# Altium PCB Tigershark 3D R2.3a - TR.PcbDoc (part 3 of 4)
Units mil, origin at the board's own origin, x right, y up, seen from the top; angles counter-clockwise.
Board outline 4100 x 4050 mil, 4 copper layers (Top Layer, Groun Plane, Power Plane, Bottom Layer), stack 61.73 mil thick; 365 components, 237 nets, 1145 pads, 790 vias.
Unrouted connection lines stored in the file: 214.
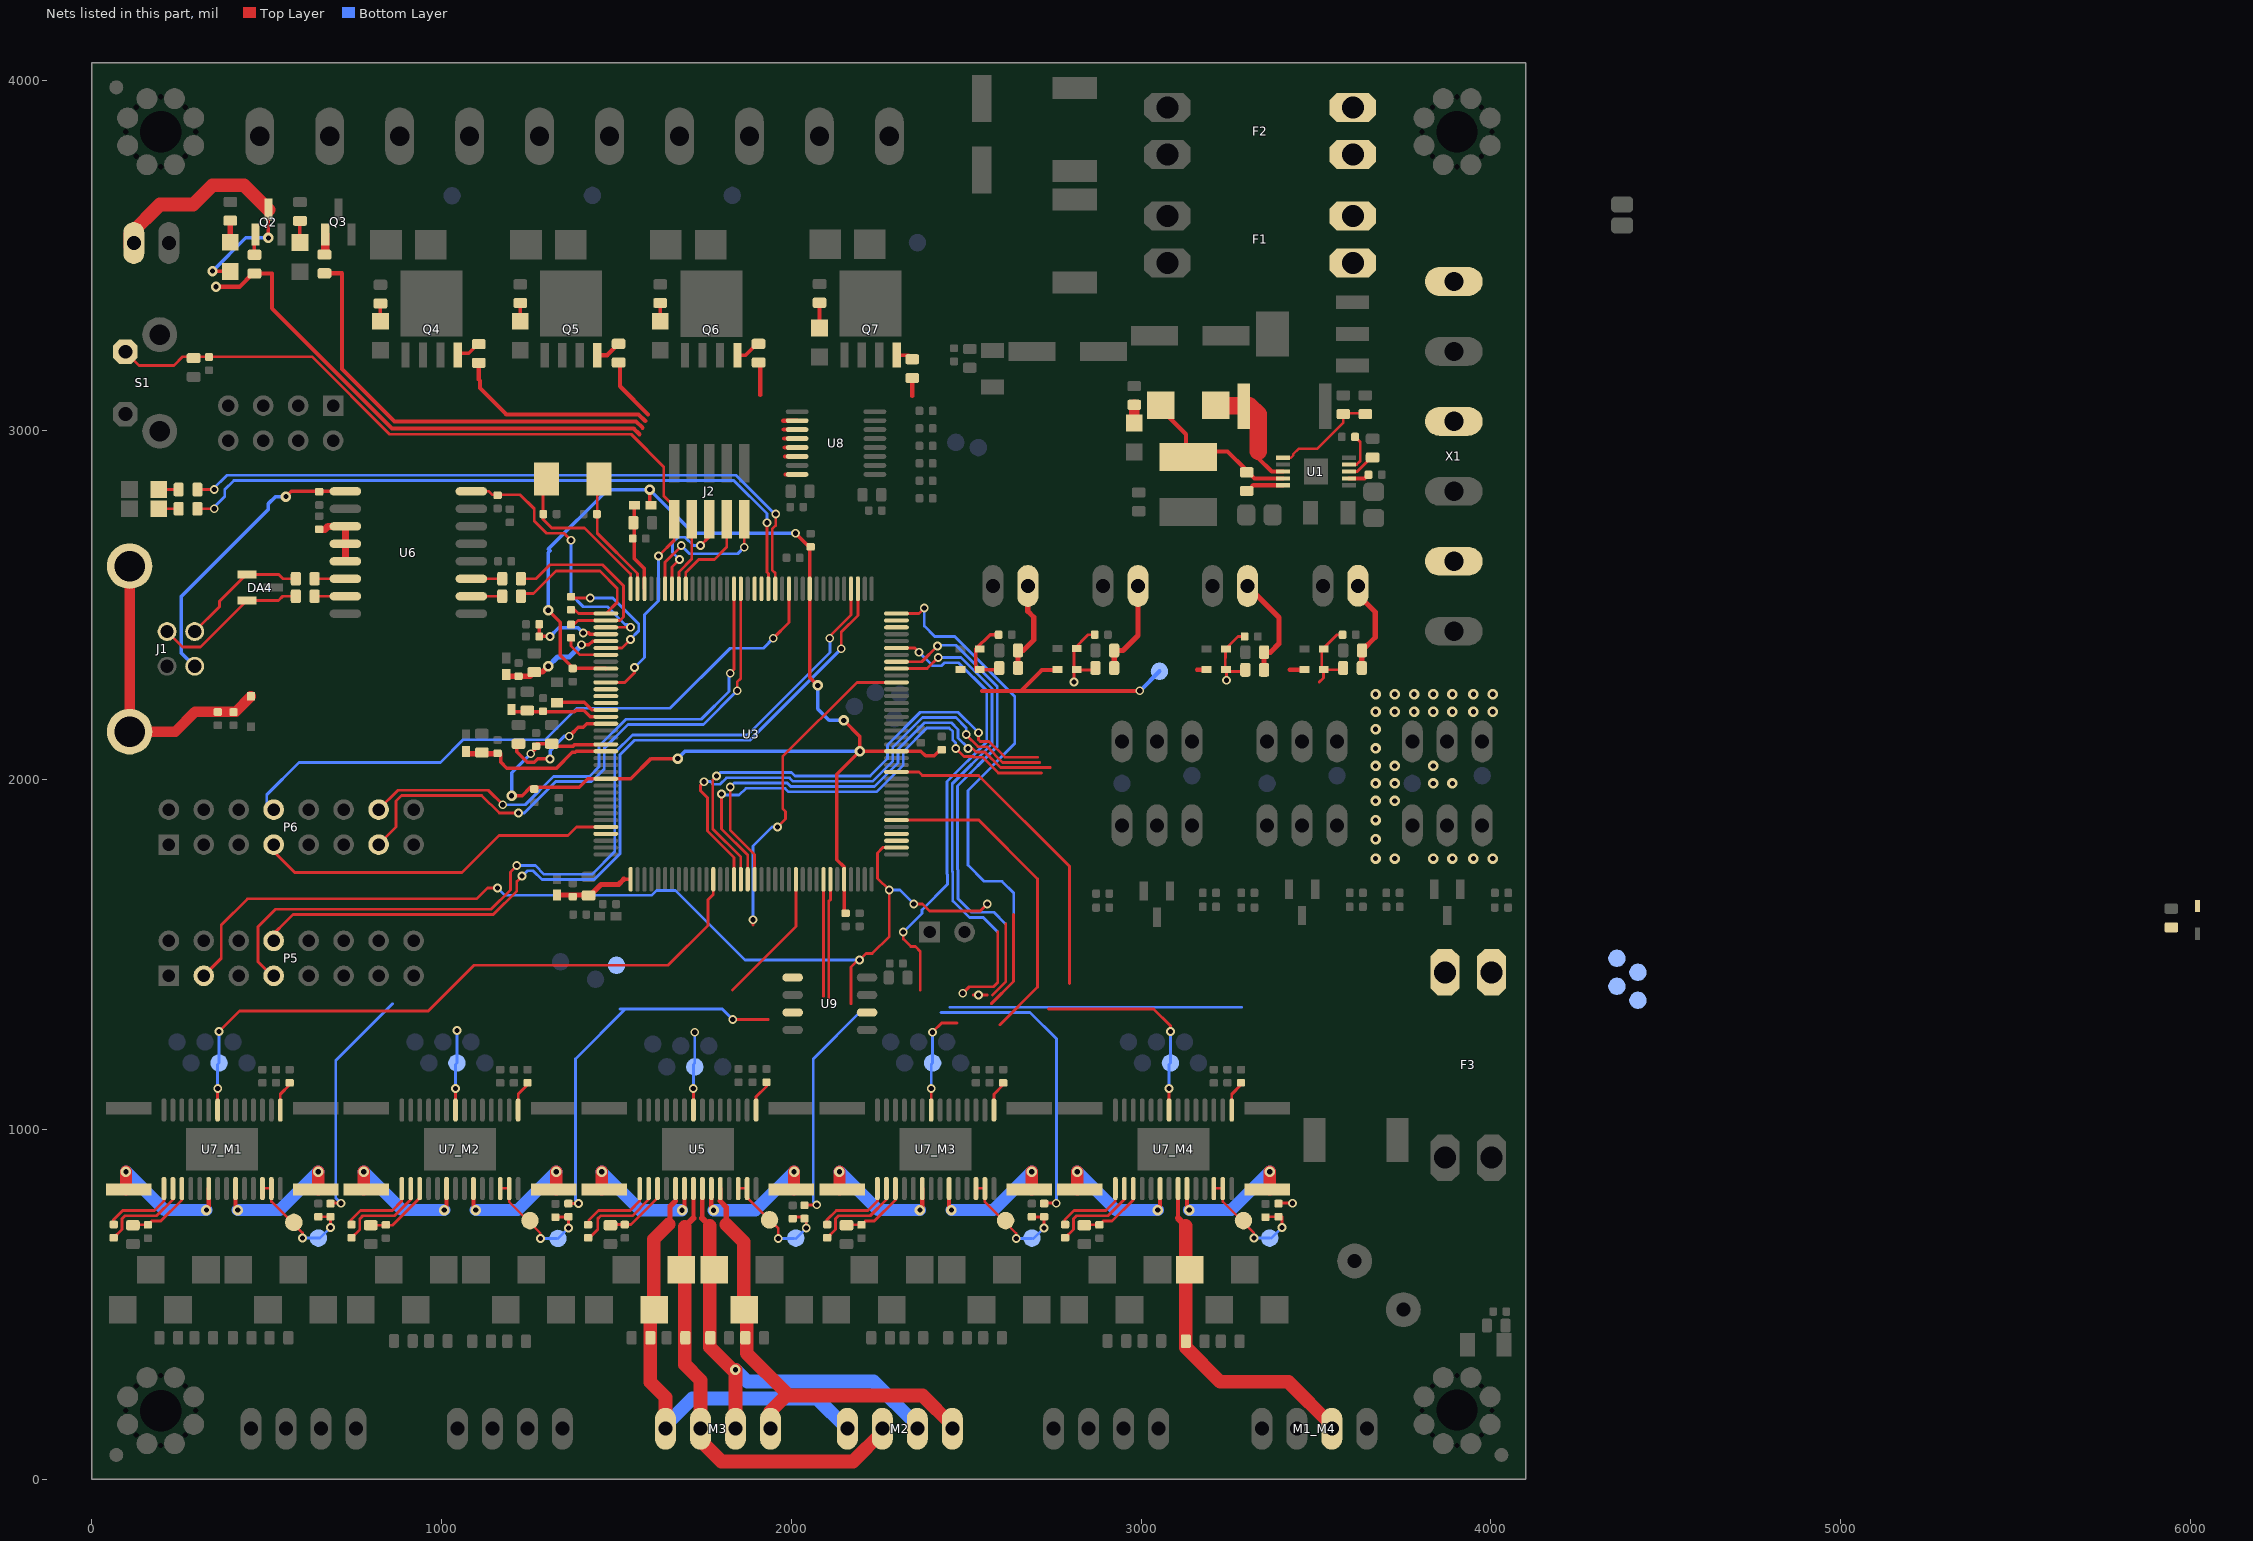
[diagram p5: the nets of this part, all layers, seen from the top]

## Via types
v1: diameter 30, hole 15, Top Layer to Bottom Layer, tented both sides, 411 vias
v2: diameter 25, hole 15, Top Layer to Bottom Layer, tented both sides, 207 vias
v3: diameter 19.68, hole 7.87, Top Layer to Bottom Layer, 75 vias
v4: diameter 30, hole 15, Top Layer to Bottom Layer, tented bottom, 64 vias
v5: diameter 25, hole 15, Top Layer to Bottom Layer, 21 vias
v6: diameter 30, hole 15, Top Layer to Bottom Layer, 9 vias
v7: diameter 45, hole 20, Top Layer to Bottom Layer, tented both sides, 2 vias
v8: diameter 25, hole 15, Top Layer to Bottom Layer, tented bottom, 1 vias

## Nets (pads, with @x,y where several pads share a name; then routed paths per layer and width w, separated by ;. In a path a pad name is that pad's centre, name@x,y a point inside that pad or via, vN(x,y) a via of type N, cw(c..) or ccw(c..) an arc to the next point about the centre after c; other vN are vias at no path point) (continued)
NetC8_M4_1: C8_M4.1 D23_M4.A M1_M4.2 U7_M4.8 | length 983.8
  Top Layer w12: 3105.29,747.2 U7_M4.8@3105.29,831.8 U7_M4.8@3105.29,832.8
  Top Layer w18: 3105.29,747.2 3127.49,725
  Top Layer w39: 3127.72,724.77 C8_M4.1@3127.72,395 3127.72,377.34 3226.05,279 3421,279 3545,155 M1_M4.2@3545,145
NetC22_1: C22.1 U1.4 | length 112
  Top Layer w8: U1.4@3594.17,2901.26 3616.03,2901.26 3626.48,2911.71 3626.48,2966.22 C22.1@3611.7,2981
NetC24_2: C24.2 D8.A J1.5 J1.6 R24.2 | length 862.1
  Top Layer w30: J1.5@108,2611.16 J1.6@108,2137.94 237.94,2137.94 295,2195 411,2195 D8.A@455,2239
NetC35_1: C35.1 R36.1 U5.3 | length 195.3
  Top Layer w8: C35.1@1482.49,726.77 1484.43,728.71 1541.56,728.71 1617.36,804.51 U5.3@1617.36,832.76
NetC40_1: C40.1 U1.10 | length 93.4
  Top Layer w12: C40.1@3314.23,2836.23 3320.2,2842.2 U1.10@3405.2,2842.2
NetC40_2: C40.2 D2.C L1.1 U1.9 | length 475.6
  Top Layer w12: D2.C@3045.26,3071 3128,2988.26 3128,2938.74 3247.03,2938.74 3296,2889.77 3323.88,2861.89 U1.9@3405.2,2861.89
NetC43_2: C43.2 U3.36 X2.1 | length 476.4
  Top Layer w8: X2.1@1300,2860 1290,2850 1290,2745 1315,2720 1408.79,2720 1540.51,2588.27 U3.36@1540.51,2546.46
NetC44_2: C44.2 U3.35 X2.2 | length 376.3
  Top Layer w8: X2.2@1445,2875 1445,2705 1560.2,2589.8 U3.35@1560.2,2546.46
NetC49_1: C49.1 U5.1 | length 218.5
  Top Layer w8: C49.1@1421.26,727.41 1421.26,741.5 1448.47,768.71 1539.14,768.71 1566.18,795.75 U5.1@1566.18,832.76
NetC49_2: C49.2 U5.2 | length 266.8
  Top Layer w8: C49.2@1421.26,689.71 1446.26,714.71 1446.26,745.29 1454.68,753.71 1545.35,753.71 1591.77,800.13 U5.2@1591.77,832.76
NetC50_2: C50.2 U5.15 | length 91.1
  Top Layer w8: U5.15@1899.09,1056.94 1899.09,1094.08 1928.75,1123.74 C50.2@1928.75,1135.74
NetC51_2: C51.2 R37.2 TP3.1 TP15.1 U5.12 U5.13 | length 358.8
  Top Layer w7: U5.12@1847.68,832.76 U5.13@1873.27,832.76 ; U5.13@1873.5,831.8 1873.5,806.22 TP3.1@1937.49,742.23 1962.75,716.97 v2(1962.75,689)
  Top Layer w8: C51.2@2007.75,750 2042.75,750 v2(2042.75,719)
  Bottom Layer w8: v2(1962.75,689) TP15.1@2007.75,689 ; TP15.1@2012.75,689 v2(2042.75,719)
NetC52_1: C52.1 D25.A M2.4 M3.4 U5.5 | length 1292.9
  Top Layer w12: 1668.55,795.99 U5.5@1668.55,832.76
  Top Layer w15: 1653.28,733.21 1653.28,780.73 1668.55,795.99
  Top Layer w39: D25.A@1606.52,519.97 1606.52,686.45 1649.52,729.45 ; D25.A@1607.75,484.74 1596.77,473.76 C52.1@1596.77,405 1596.77,278.23 1640,235 M3.4@1640,145
  Bottom Layer w39: M3.4@1640,145 1640,155 1716.5,231.5 2073.5,231.5 M2.4@2160,145
NetC58_1: C58.1 J1.1 U6.1 | length 819.1
  Top Layer w10: v1(555,2810) 570,2825 U6.1@724.88,2825
  Bottom Layer w10: J1.1@294,2324.94 255,2363.94 255,2524 505,2774 505,2790 525,2810 v1(555,2810)
NetC62_1: C62.1 D26.A M2.3 M3.3 U5.7 | length 1292.9
  Top Layer w12: 1719.73,747.17 U5.7@1719.73,832.76
  Top Layer w18: 1697.52,724.97 1719.73,747.17
  Top Layer w39: 1695.52,722.97 1695.52,394.74 1695.52,328.24 1740,283.76 M3.3@1740,145 ; M3.3@1740,111.5 1800,51.5 2176.4,51.5 M2.3@2260,135.1
NetC66_M1_1: C66_M1.1 R30_M1.1 U7_M1.3 | length 202.5
  Top Layer w8: C66_M1.1@117.49,726.77 118.62,727.9 R30_M1.1@160.49,727.9 171.33,738.74 196.98,738.74 257.33,799.09 U7_M1.3@257.33,831.8
NetC66_M2_1: C66_M2.1 R30_M2.1 U7_M2.3 | length 199.3
  Top Layer w8: C66_M2.1@797.49,726.77 859.56,726.77 937.33,804.54 U7_M2.3@937.33,831.8
NetC66_M3_1: C66_M3.1 R30_M3.1 U7_M3.3 | length 202.5
  Top Layer w8: C66_M3.1@2157.49,726.77 2158.62,727.9 R30_M3.1@2200.49,727.9 2211.33,738.74 2236.98,738.74 2297.33,799.09 U7_M3.3@2297.33,831.8
NetC66_M4_1: C66_M4.1 R30_M4.1 U7_M4.3 | length 202.5
  Top Layer w8: C66_M4.1@2837.49,726.77 2838.62,727.9 R30_M4.1@2880.49,727.9 2891.33,738.74 2916.98,738.74 2977.33,799.09 U7_M4.3@2977.33,831.8
NetC67_1: C67.1 D27.A M2.1 M3.1 U5.10 | length 1281.7
  Top Layer w12: 1796.5,795.99 U5.10@1796.5,832.76
  Top Layer w15: 1796.5,795.99 1813.52,778.97 1813.52,728.97
  Top Layer w39: 1813.52,728.97 1863.52,678.97 1863.52,519.97 D27.A@1872.52,510.97 ; D27.A@1864.75,484.74 1871.98,477.51 1871.98,394.74 1871.98,361.03 1985,248.01 1985,240 ; M3.1@1940,145 1940,195 1985,240 ; M2.1@2460,145 2460,155 2375,240 1985,240
NetC68_M1_1: C68_M1.1 U7_M1.1 | length 218.5
  Top Layer w8: C68_M1.1@61.23,727.44 61.23,741.53 88.44,768.74 179.11,768.74 206.15,795.79 U7_M1.1@206.15,832.8
NetC68_M1_2: C68_M1.2 U7_M1.2 | length 266.8
  Top Layer w8: C68_M1.2@61.23,689.74 86.23,714.74 86.23,745.32 94.65,753.74 185.32,753.74 231.74,800.16 U7_M1.2@231.74,832.8
NetC68_M2_1: C68_M2.1 U7_M2.1 | length 218.5
  Top Layer w8: C68_M2.1@741.23,727.44 741.23,741.53 768.44,768.74 859.11,768.74 886.15,795.79 U7_M2.1@886.15,832.8
NetC68_M2_2: C68_M2.2 U7_M2.2 | length 266.8
  Top Layer w8: C68_M2.2@741.23,689.74 766.23,714.74 766.23,745.32 774.65,753.74 865.32,753.74 911.74,800.16 U7_M2.2@911.74,832.8
NetC68_M3_1: C68_M3.1 U7_M3.1 | length 218.5
  Top Layer w8: C68_M3.1@2101.23,727.44 2101.23,741.53 2128.44,768.74 2219.11,768.74 2246.15,795.79 U7_M3.1@2246.15,832.8
NetC68_M3_2: C68_M3.2 U7_M3.2 | length 266.8
  Top Layer w8: C68_M3.2@2101.23,689.74 2126.23,714.74 2126.23,745.32 2134.65,753.74 2225.32,753.74 2271.74,800.16 U7_M3.2@2271.74,832.8
NetC68_M4_1: C68_M4.1 U7_M4.1 | length 218.5
  Top Layer w8: C68_M4.1@2781.23,727.44 2781.23,741.53 2808.44,768.74 2899.11,768.74 2926.15,795.79 U7_M4.1@2926.15,832.8
NetC68_M4_2: C68_M4.2 U7_M4.2 | length 266.8
  Top Layer w8: C68_M4.2@2781.23,689.74 2806.23,714.74 2806.23,745.32 2814.65,753.74 2905.32,753.74 2951.74,800.16 U7_M4.2@2951.74,832.8
NetC71_M1_2: C71_M1.2 U7_M1.15 | length 88.9
  Top Layer w8: U7_M1.15@538.83,1057.2 538.83,1101.34 566.23,1128.74 C71_M1.2@566.23,1134.74
NetC71_M2_2: C71_M2.2 U7_M2.15 | length 88.9
  Top Layer w8: U7_M2.15@1218.83,1057.2 1218.83,1101.34 1246.23,1128.74 C71_M2.2@1246.23,1134.74
NetC71_M3_2: C71_M3.2 U7_M3.15 | length 88.9
  Top Layer w8: U7_M3.15@2578.83,1057.2 2578.83,1101.34 2606.23,1128.74 C71_M3.2@2606.23,1134.74
NetC71_M4_2: C71_M4.2 U7_M4.15 | length 88.9
  Top Layer w8: U7_M4.15@3258.83,1057.2 3258.83,1101.34 3286.23,1128.74 C71_M4.2@3286.23,1134.74
NetC72_1: C72.1 D28.A M2.2 M3.2 U5.8 | length 1327.8
  Top Layer w12: 1745.32,747.17 U5.8@1745.32,832.76
  Top Layer w18: 1745.32,747.17 1766.98,725.51
  Top Layer w39: 1766.98,725.51 1766.98,394.74 1766.98,378.02 1831.24,313.76 v1(1840,313.76) M3.2@1840,145
  Bottom Layer w39: v1(1840,313.76) 1873.76,280 2234.9,280 2360,154.9 M2.2@2360,145
NetC73_2: C73.2 R23.2 U3.40 | length 243.6
  Top Layer w10: C73.2@1279,2445 R23.2@1279,2410 v2(1310,2410) ; v2(1405,2420) 1420,2420 1423.46,2416.54 U3.40@1469.65,2416.54
  Bottom Layer w10: v2(1310,2410) 1335,2435 1390,2435 v2(1405,2420)
NetC75_M1_2: C75_M1.2 R31_M1.2 TP1_M1.1 TP33_M1.1 U7_M1.12 U7_M1.13 | length 363.8
  Top Layer w7: U7_M1.12@487.65,832.8 513.24,832.8 513.24,794.25 602.49,705 v2(602.49,690)
  Top Layer w8: C75_M1.2@647.49,751 R31_M1.2@682.49,751 v2(682.49,720)
  Bottom Layer w8: v2(602.49,690) TP33_M1.1@647.49,690 652.49,690 v2(682.49,720)
NetC75_M2_2: C75_M2.2 R31_M2.2 TP1_M2.1 TP33_M2.1 U7_M2.12 U7_M2.13 | length 358.8
  Top Layer w7: U7_M2.12@1167.65,832.8 U7_M2.13@1193.24,832.8 ; U7_M2.13@1193.24,831.8 1193.24,793.25 1282.49,704 v2(1282.49,689)
  Top Layer w8: C75_M2.2@1327.49,750 1362.49,750 v2(1362.49,719)
  Bottom Layer w8: v2(1282.49,689) TP33_M2.1@1327.49,689 ; TP33_M2.1@1332.49,689 v2(1362.49,719)
NetC75_M3_2: C75_M3.2 R31_M3.2 TP1_M3.1 TP33_M3.1 U7_M3.12 U7_M3.13 | length 358.8
  Top Layer w7: U7_M3.12@2527.65,832.8 U7_M3.13@2553.24,832.8 ; U7_M3.13@2553.24,831.8 2553.24,793.25 2642.49,704 v2(2642.49,689)
  Top Layer w8: C75_M3.2@2687.49,750 2722.49,750 v2(2722.49,719)
  Bottom Layer w8: v2(2642.49,689) TP33_M3.1@2687.49,689 ; TP33_M3.1@2692.49,689 v2(2722.49,719)
NetC75_M4_2: C75_M4.2 R31_M4.2 TP1_M4.1 TP33_M4.1 U7_M4.12 U7_M4.13 | length 358.8
  Top Layer w7: U7_M4.12@3207.65,832.8 3233.24,832.8 3233.24,794.25 3322.49,705 v2(3322.49,690)
  Top Layer w8: 3367.49,751 3402.49,751 v2(3402.49,720)
  Bottom Layer w8: v2(3322.49,690) TP33_M4.1@3367.49,690 ; TP33_M4.1@3372.49,690 v2(3402.49,720)
NetD2_A: D2.A R9.2 U1.8 | length 326.9
  Top Layer w12: 3334.12,2940 3334.12,2920.78 3373.33,2881.57 U1.8@3405.2,2881.57
  Top Layer w50: D2.A@3214,3070 R9.2@3293.86,3070 ; R9.2@3308.86,3070 3334.12,3044.74 3334.12,2940
NetD10_A: D10.A R13.1 | length 61.9
  Top Layer w15: D10.A@396,3536.91 R13.1@396,3598.8
NetD10_C: D10.C FAN-1.2 Q2.3 | length 848.3
  Top Layer w10: v1(345,3454.57) 346,3453.57 D10.C@396,3453.57 ; v1(505,3549.57) Q2.3@505,3630.22
  Top Layer w39: FAN-1.2@110,3525 110,3560 195,3645 290,3645 345,3700 435.22,3700 Q2.3@505,3630.22
  Bottom Layer w10: v1(345,3454.57) 440,3549.57 v1(505,3549.57)
NetD11_A: D11.A R47.1 | length 66.1
  Top Layer w10: D11.A@595,3536.34 R47.1@595,3598.23 ; D11.A@601,3523.34 D11.A@604,3520.34
NetD13_A: D13.A R56.1 | length 50.5
  Top Layer w10: D13.A@825,3311.34 R56.1@825,3361.87
NetD14_A: D14.A R60.1 | length 51.9
  Top Layer w10: D14.A@1225,3311.34 R60.1@1225,3363.23
NetD16_A: D16.A R64.1 | length 51.9
  Top Layer w10: D16.A@1625,3311.34 R64.1@1625,3363.23
NetD18_A: D18.A R68.1 | length 52
  Top Layer w12: D18.A@2080.5,3295.53 2080.5,3347.5
NetD24_A: D24.A R25.2 | length 56.9
  Top Layer w8: D24.A@191.34,2830 R25.2@248.23,2830
NetD29_A: D29.A R26.2 | length 56.9
  Top Layer w8: D29.A@191.34,2775 R26.2@248.23,2775
NetF1_1: F1.1 X1.3
NetF2_1: F2.1 X1.1
NetF3_1: F3.1 X1.5
  other v1: 3670,1775 3725,1775 3835,1775 3890,1775 3950,1775 4005,1775 3670,1830 3670,1885 3670,1940 3725,1940 3670,1990 3725,1990 3835,1990 3890,1990 3670,2040 3725,2040 3835,2040 3670,2090 3670,2145 3670,2195 3725,2195 3780,2195 3835,2195 3890,2195 3950,2195 4005,2195 3670,2245 3725,2245 3780,2245 3835,2245 3890,2245 3950,2245 4005,2245
NetLED1_A: LED1.A R11.1 | length 51.9
  Top Layer w30: LED1.A@2980,3020.34 R11.1@2980,3072.23
NetP2_TR1_1: P2_TR1.1 R14_TR1.1 R19_TR1.1 | length 277.6
  Top Layer w15: R14_TR1.1@2922.77,2320.04 R19_TR1.1@2922.77,2370.04 2948.04,2370.04 2991,2413 P2_TR1.1@2991,2554.57
NetP2_TR2_1: P2_TR2.1 R14_TR2.1 R19_TR2.1 | length 269.3
  Top Layer w15: R14_TR2.1@2647.77,2320.04 R19_TR2.1@2647.77,2370.04 2663.04,2370.04 2693.05,2400.05 2693.05,2465.05 2676,2482.09 P2_TR2.1@2676,2554.57
NetP2_TR3_1: P2_TR3.1 R14_TR3.1 R19_TR3.1 | length 271.2
  Top Layer w15: P2_TR3.1@3619.53,2555 3619.53,2529.06 3669.06,2479.53 3669.06,2407.76 R19_TR3.1@3631.3,2370 ; R14_TR3.1@3630.82,2320 R19_TR3.1@3630.82,2370
NetP2_TR4_1: P2_TR4.1 R14_TR4.1 R19_TR4.1 | length 311.2
  Top Layer w8: R19_TR4.1@3351.3,2365 R19_TR4.1@3355.53,2369.23
  Top Layer w15: P2_TR4.1@3304.06,2554.53 3394.06,2464.53 3394.06,2389.53 3369.52,2365 R19_TR4.1@3351.3,2365 ; R14_TR4.1@3351.3,2314.52 R19_TR4.1@3351.3,2364.52
NetQ2_1: Q2.1 R45.2 | length 68.9
  Top Layer w10: R45.2@465,3501.34 465,3566.53 Q2.1@467.6,3569.13
NetQ3_1: Q3.1 R52.2 | length 58.9
  Top Layer w25: R52.2@665,3501.77 667.6,3504.38 Q3.1@667.6,3559.57
NetQ4_4: Q4.4 R58.2 | length 73.2
  Top Layer w10: Q4.4@1046.5,3214.66 1051.36,3219.53 1077.75,3219.53 R58.2@1106,3247.77
NetQ5_4: Q5.4 R62.2 | length 74.5
  Top Layer w12: Q5.4@1445,3214.28 1473.5,3214.28 R62.2@1506,3246.77
NetQ6_4: Q6.4 R66.2 | length 72.4
  Top Layer w10: Q6.4@1846,3213.85 1868.85,3213.85 R66.2@1903.89,3248.89
NetQ7_4: Q7.4 R70.2 | length 49
  Top Layer w10: Q7.4@2301.5,3214.66 2333.41,3214.66 R70.2@2345.49,3202.58
NetR4_1: R4.1 U3.51 | length 158.6
  Top Layer w10: R4.1@1320,2221.57 1407.47,2221.57 1429.04,2200 U3.51@1469.65,2200
NetR5_1: R5.1 U3.42 | length 360.6
  Top Layer w8: R5.1@1370,2523.9 1373.9,2520 v2(1425,2520) ; U3.42@1469.65,2377.17 1516.06,2377.17 v2(1540,2401.1)
  Bottom Layer w8: v2(1425,2520) 1489.34,2520 1563.5,2445.84 1563.5,2426.37 1540,2402.87 v2(1540,2401.1)
NetR6_1: R6.1 U3.53 | length 352.5
  Top Layer w10: R6.1@1215,2093.23 1215,2080 1244.5,2050.5 1265.15,2050.5 1274.65,2060 v2(1310,2060) ; v2@1360,2120 1370,2120 1370,2129.65 1390.85,2150.5 1405.15,2150.5 1415.28,2160.63 U3.53@1469.65,2160.63
  Bottom Layer w10: v2(1310,2060) 1310,2084 1310.12,2084 1351.12,2125 v2(1365,2125)
NetR7_1: R7.1 U1.3 | length 76.4
  Top Layer w8: U1.3@3594.17,2881.57 3617.57,2881.57 3649.86,2913.86 R7.1@3657.16,2913.86
NetR10_2: R10.2 R12.1 U1.6 | length 291.8
  Top Layer w7: U1.6@3405.2,2920.94 3427.94,2920.94 3434.82,2927.82 3434.82,2931.51 3449.75,2946.44 3502.44,2946.44 3578,3022 R10.2@3578,3040.85 ; R10.2@3585.55,3048.4 R12.1@3641.64,3048.4
NetR17_1: R17.1 U1.2 | length 56.9
  Top Layer w12: U1.2@3594.17,2861.89 3638.27,2861.89 R17.1@3647.32,2870.95
NetR22_1: R22.1 U3.43 | length 123.4
  Top Layer w8: R22.1@1370,2396.1 1370,2382.87 1395.39,2357.48 U3.43@1469.65,2357.48
NetR32_M1_2: R32_M1.2 U7_M1.9 | length 392.5
  Top Layer w12: U7_M1.9@410.88,832.8 410.88,776.61 v1(417.49,770)
  Top Layer w35: R32_M1.2@647.49,828.6 v1(647.49,880)
  Bottom Layer w35: v1(417.49,770) 537.49,770 v1(647.49,880)
NetR32_M2_2: R32_M2.2 U7_M2.9 | length 392.5
  Top Layer w12: U7_M2.9@1090.88,832.8 1090.88,776.61 v1(1097.49,770)
  Top Layer w35: R32_M2.2@1327.49,828.6 v1(1327.49,880)
  Bottom Layer w35: v1(1097.49,770) 1217.49,770 v1(1327.49,880)
NetR32_M3_2: R32_M3.2 U7_M3.9 | length 392.5
  Top Layer w12: U7_M3.9@2450.88,832.8 2450.88,776.61 v1(2457.49,770)
  Top Layer w35: R32_M3.2@2687.49,828.6 v1(2687.49,880)
  Bottom Layer w35: v1(2457.49,770) 2577.49,770 v1(2687.49,880)
NetR32_M4_2: R32_M4.2 U7_M4.9 | length 392.5
  Top Layer w12: U7_M4.9@3130.88,832.8 3130.88,776.61 v1(3137.49,770)
  Top Layer w35: R32_M4.2@3367.49,828.6 v1(3367.49,880)
  Bottom Layer w35: v1(3137.49,770) 3257.49,770 v1(3367.49,880)
NetR33_M1_2: R33_M1.2 U7_M1.6 | length 392.5
  Top Layer w12: v1(327.49,770) 334.1,776.61 U7_M1.6@334.1,832.8
  Top Layer w35: R33_M1.2@97.49,828.6 v1(97.49,880)
  Bottom Layer w35: v1(97.49,880) 207.49,770 v1(327.49,770)
NetR33_M2_2: R33_M2.2 U7_M2.6 | length 392.5
  Top Layer w12: v1(1007.49,770) 1014.1,776.61 U7_M2.6@1014.1,832.8
  Top Layer w35: R33_M2.2@777.49,828.6 v1(777.49,880)
  Bottom Layer w35: v1(777.49,880) 887.49,770 v1(1007.49,770)
NetR33_M3_2: R33_M3.2 U7_M3.6 | length 392.2
  Top Layer w12: v1(2367.49,770) 2374.1,776.61 U7_M3.6@2374.1,832.8
  Top Layer w35: R33_M3.2@2137.49,828.86 v1(2137.49,880)
  Bottom Layer w35: v1(2137.49,880) 2247.49,770 v1(2367.49,770)
NetR33_M4_2: R33_M4.2 U7_M4.6 | length 392.5
  Top Layer w12: v1(3047.49,770) 3054.1,776.61 U7_M4.6@3054.1,832.8
  Top Layer w35: R33_M4.2@2817.49,828.6 v1(2817.49,880)
  Bottom Layer w35: v1(2817.49,880) 2927.49,770 v1(3047.49,770)
NetR38_2: R38.2 U5.9 | length 392.5
  Top Layer w12: U5.9@1770.91,832.76 1770.91,776.58 v1(1777.52,769.97)
  Top Layer w35: R38.2@2007.52,828.6 v1(2007.52,879.97)
  Bottom Layer w35: v1(1777.52,769.97) 1897.52,769.97 v1(2007.52,879.97)
NetR39_2: R39.2 U5.6 | length 392.5
  Top Layer w12: v1(1687.52,769.97) 1694.14,776.58 U5.6@1694.14,832.76
  Top Layer w35: R39.2@1457.52,828.6 v1(1457.52,879.97)
  Bottom Layer w35: v1(1457.52,879.97) 1567.52,769.97 v1(1687.52,769.97)
NetR45_1: R45.1 U8.16 | length 1503.6
  Top Layer w12: v1(355,3409.57) 421.77,3409.57 R45.1@460,3447.8 ; R45.1@465,3447.8 515,3447.8 515,3348.13 858.13,3005 1549.04,3005 1566.04,2988 ; 1983.43,2873.43 U8.16@2016.34,2873.43
NetR52_1: R52.1 U8.14 | length 1286
  Top Layer w12: R52.1@665,3448.23 715,3448.23 715,3175 865,3025 1555.91,3025 1573.91,3007 ; 1982.09,2924.61 U8.14@2016.34,2924.61
NetR58_1: R58.1 U8.13 | length 615.1
  Top Layer w12: 1106,3144.77 R58.1@1106,3192.23 ; 1109.77,3141 1109.77,3120.23 1185,3045 1563.13,3045 1582.13,3026 ; 1980.81,2950.2 U8.13@2016.34,2950.2
NetR62_1: R62.1 U8.12 | length 214.5
  Top Layer w12: R62.1@1509.77,3189.46 1509.77,3142 1509.77,3125.23 1590,3045 ; 1979.54,2975.8 U8.12@2016.34,2975.8
NetR66_1: R66.1 U8.11 | length 125.8
  Top Layer w12: 1910.77,3100.77 1910.77,3142 R66.1@1910.77,3188.46 ; 1978.26,3001.39 U8.11@2016.34,3001.39
NetR70_1: R70.1 U8.10 | length 90.8
  Top Layer w12: 1976.98,3026.98 U8.10@2016.34,3026.98 ; 2345.49,3097.58 R70.1@2345.49,3149.04
NRST: U3.69
OVREF: D1.2 D3_TR1.C D3_TR2.C D3_TR3.C D3_TR4.C R1.1 TP2.1 | length 730.6
  Top Layer w12: 2544.93,2254.55 2655.97,2254.55 ; D3_TR1.C@2759.43,2314.57 2716,2314.57 2655.97,2254.55 ; v2(2996.25,2254.55) 2655.97,2254.55 ; 3159.53,2315 D3_TR4.C@3187.95,2315 ; 3424.53,2315 D3_TR3.C@3467.95,2315
  Bottom Layer w12: v2(2996.25,2254.55) TP2.1@3052.22,2310.52
R_N: DA4.1 J1.2 R18.2 | length 368.4
  Top Layer w8: J1.2@294,2424.15 365,2495.15 365,2510.84 433.66,2579.5 435.58,2579.5 DA4.1@443.48,2587.4 534.39,2587.4 546.8,2575 R18.2@580.47,2575
R_P: DA4.2 J1.3 R20.2 | length 443.8
  Top Layer w8: J1.3@215,2424.15 259.15,2380 310.88,2380 DA4.2@443.48,2512.6 533.48,2512.6 545.88,2525 R20.2@580.47,2525
REF1: R31_M1.1 U3.139 | length 1974
  Top Layer w8: R31_M1.1@682.49,788.9 683.59,790 v2(712.49,790) ; U3.139@2300.35,2377.17 2352.83,2377.17 v2(2365,2365) ; v5(2320,1565) 2320,1545 2341.5,1523.5 2354.73,1523.5 2368.5,1509.73 2368.5,1398.5
  Bottom Layer w8: v2(712.49,790) 697.49,805 697.49,1197.52 859.97,1360 ; v5(2320,1565) 2373.5,1618.5 2373.5,1628.5 2446.5,1701.5 2446.5,1729.86 2445,1731.36 2445,1995 2558.5,2108.5 2558.5,2254.73 2478.23,2335 2438.23,2335 2429.73,2326.5 2403.5,2326.5 v2(2365,2365)
REF2: R31_M2.1 U3.102 | length 1426
  Top Layer w8: R31_M2.1@1362.49,788.9 v2(1391.39,788.9) ; v8(1832.49,1315) 1933.7,1315 ; 2106.69,1375.48 2106.69,1652.91 2111.38,1657.59 U3.102@2111.38,1715.75
  Bottom Layer w8: v2(1391.39,788.9) 1382.49,797.8 1382.49,1202.48 1525.01,1345 ; 1510.01,1345 1802.49,1345 v8(1832.49,1315)
REF3: R31_M3.1 U3.136 | length 2271.4
  Top Layer w8: U3.136@2300.35,2318.11 2388.11,2318.11 v2(2420,2350) v2@2425,2350 ; v2(2490,1390) 2508.5,1408.5 2577.29,1408.5 2590,1421.21 2590,1565 ; R31_M3.1@2722.49,788.9 2723.59,790 v5(2757.49,790)
  Bottom Layer w8: v2(2420,2350) 2484.45,2350 2573.5,2260.95 2573.5,2102.29 2460,1988.79 2460,1737.57 2461.5,1736.07 2461.5,1654.05 2509.05,1606.5 2548.5,1606.5 2590,1565 ; 2427.49,1335 2682.49,1335 2757.49,1260 v5(2757.49,790)
REF4: R31_M4.1 U3.137 | length 2310.9
  Top Layer w8: U3.137@2300.35,2337.8 2372.8,2337.8 v2(2417.5,2382.5) ; 2520,1385 2560,1385 ; 2575,1385 2612.63,1422.63 2612.63,1587.63 ; R31_M4.1@3392.49,788.9 3393.59,790 v5(3432.49,790)
  Bottom Layer w8: v2(2417.5,2382.5) 2420,2385 2470.66,2385 2588.5,2267.16 2588.5,2096.07 2475,1982.57 2475,1743.79 2476.5,1742.29 2476.5,1660.27 2515.27,1621.5 2578.75,1621.5 2612.63,1587.63 ; 2452.49,1350 3287.49,1350
  other v2: 2535,1385
REF_EXP1: P6.13 U3.20 | length 1643.5
  Top Layer w8: P6.13@800,1815 P6.13@820,1815 870,1865 870,1940 885.53,1955.53 1114.47,1955.53 1165,1905 v2(1220,1905) ; v2(1845,2255) 1845,2280 1855.47,2290.47 U3.20@1855.47,2546.46
  Bottom Layer w8: v2(1220,1905) 1236.21,1905 1326.21,1995 1428.79,1995 1465,2031.21 1465,2090.41 1533.09,2158.5 1748.5,2158.5 v2(1845,2255)
REF_EXP2: P6.14 U3.21 | length 1530.1
  Top Layer w8: P6.14@800,1915 P6.14@820,1915 875.53,1970.53 1133.47,1970.53 v2(1175,1929) ; v2(1825,2305) 1835.79,2315.79 U3.21@1835.79,2546.46
  Bottom Layer w8: v2(1175,1929) 1239,1929 1320,2010 1422.57,2010 1450,2037.43 1450,2096.62 1526.88,2173.5 1742.29,2173.5 1821.5,2252.71 1821.5,2301.5 v2(1825,2305)
REF_Z: R37.1 U3.144 | length 2171.1
  Top Layer w8: R37.1@2037.49,783.9 2038.59,785 v5(2072.49,785) ; U3.144@2300.35,2475.59 2364.41,2475.59 v2(2380,2491.18) ; 2571.21,1360 2635,1423.79 2635,1615
  Bottom Layer w8: v5(2072.49,785) 2062.49,795 2062.49,1202.48 2197.49,1337.48 ; v2(2380,2491.18) 2380,2440 2410,2410 2466.87,2410 2638.5,2238.37 2638.5,2103.5 2505,1970 2505,1756.21 2551.21,1710 2601.77,1710 2635.61,1676.16 2635.61,1615
RESET: C63.2 J2.10 R21.1 S1.1 U3.47 | length 2437.3
  Top Layer w8: S1.1@96,3224 135,3185 235,3185 260,3210 629.09,3210 851.09,2988 1542,2988 1635,2895 1635,2812.11 1665,2782.11 J2.10@1665,2745.08 1665,2685 v2(1620,2640) ; U3.47@1469.65,2278.74 1523.74,2278.74 1551.19,2306.19 v2(1551.19,2321.6)
  Bottom Layer w8: v2(1551.19,2321.6) 1580,2350.41 1580,2472.2 1620,2512.2 v2(1620,2640)
RXD0: P5.8 U3.3 | length 2382.1
  Top Layer w8: P5.8@500,1540 575,1615 1147.57,1615 1215,1682.43 1215,1710 v2(1230,1725) ; v2(2142.43,2375) 2142.43,2422.43 2190.12,2470.12 U3.3@2190.12,2546.46
  Bottom Layer w8: v2(1230,1725) 1245,1740 1262.02,1740 1287.02,1715 1436.21,1715 1510,1788.79 1510,2071.77 1551.73,2113.5 1880.93,2113.5 v2(2142.43,2375)
RXD1: U3.18
SCLK: P5.3 TP6.1 U3.110 U9.6 | length 3030.7
  Top Layer w8: P5.3@300,1440 P5.3@320,1440 370,1490 370,1585 445,1660 1100,1660 1131.21,1691.21 v2(1160,1691.21) ; 2170,1360 2170,1465 v2@2195,1490 ; v2(2195,1485) 2213.5,1503.5 2230.93,1503.5 2280,1552.57 v2(2280,1685) 2246.39,1718.61 2246.39,1791.39 2261.3,1806.3 U3.110@2300.35,1806.3 ; v2(2350,1645) 2375,1645 2395,1625 2540,1625 v2(2560,1645)
  Bottom Layer w8: v2(1160,1691.21) 1181.21,1670 1600.55,1670 1614.05,1683.5 1669.07,1683.5 1867.57,1485 v2(2195,1485) ; v2(2280,1685) 2310,1685 v2(2350,1645)
SHDN: U3.50
SPIFLASH_CS: U9.1
STATUS_A: U3.142
STATUS_B: U3.143
STEP1: TP40_M1.1 U3.85 U7_M1.22 | length 1886.8
  Top Layer w8: U7_M1.22@359.69,1057.2 v2(359.69,1117.64) ; v2(363.72,1280.77) 422.42,1339.47 961.64,1339.47 1092.17,1470 1647.28,1470 1761.5,1584.22 1761.5,1657.16 1776.73,1672.39 U3.85@1776.73,1715.75
  Bottom Layer w8: v2@359.49,1117.84 v2(359.69,1117.64) 359.69,1186.75 TP40_M1.1@363.72,1190.77 v2(363.72,1280.77)
STEP2: TP40_M2.1 U3.134 U7_M2.22 | length 1171.6
  Top Layer w8: U7_M2.22@1039.69,1057.2 v2(1039.69,1117.64) ; 1890,1585 v2(1890,1600) ; v2(1960,1865) 1983.5,1888.5 1983.5,1909.73 1975,1918.23 1975,2066.36 2187.38,2278.74 U3.134@2300.35,2278.74
  Bottom Layer w8: v2@1039.49,1117.84 v2(1039.69,1117.64) 1039.69,1186.75 TP40_M2.1@1043.72,1190.77 v2@1043.72,1280.77 ; v2(1890,1600) 1890,1810.55 1944.45,1865 v2(1960,1865)
  other v2: 1043.75,1283.74
STEP3: TP40_M3.1 U3.114 U7_M3.22 | length 1242.1
  Top Layer w8: U3.114@2301.42,1886.1 U3.114@2300.35,1885.04 2535.62,1885.04 2703.5,1717.16 2703.5,1407.43 2596.07,1300 ; U7_M3.22@2399.69,1057.2 v2(2399.69,1117.64) ; v2(2403.75,1278.74) 2430.01,1305 2473.56,1305
  Bottom Layer w8: v2@2399.49,1117.84 v2(2399.69,1117.64) 2399.69,1186.75 TP40_M3.1@2403.72,1190.77 v2@2403.72,1280.77
STEP4: TP40_M4.1 U3.121 U7_M4.22 | length 1552.1
  Top Layer w8: U3.121@2300.35,2022.83 2300.69,2022.5 2364.4,2022.5 2374.31,2012.59 2535.35,2012.59 2795,1752.94 2795,1417.57 ; 2735.06,1345 3035.72,1345 3083.72,1297.01 v2(3083.72,1280.77) ; U7_M4.22@3079.69,1057.2 v2(3079.69,1117.64)
  Bottom Layer w8: v2@3079.49,1117.84 v2(3079.69,1117.64) 3079.69,1186.75 TP40_M4.1@3083.72,1190.77 v2(3083.72,1280.77)
STEP_EXP1: P6.7 U3.68 | length 1056.8
  Top Layer w8: P6.7@500,1815 580,1735 1058.13,1735 1164.11,1840.98 1360.98,1840.98 1385.35,1865.35 U3.68@1469.65,1865.35
STEP_EXP2: P6.8 U3.13 | length 1836.2
  Top Layer w8: v2(1948.23,2405) 1993.27,2450.03 U3.13@1993.27,2546.46
  Bottom Layer w8: P6.8@500,1915 500,1957.57 592.43,2050 996.77,2050 1061.77,2115 1297.28,2115 1387.28,2205 1653.64,2205 1825.14,2376.5 1919.73,2376.5 v2(1948.23,2405)
STEP_Z: TP21.1 U3.97 U5.22 | length 615.3
  Top Layer w8: U5.22@1719.73,1057.17 v5(1719.73,1117.61) ; 1831.26,1398.98 2012.95,1580.67 U3.97@2012.95,1715.75
  Bottom Layer w8: v5(1719.73,1117.61) 1719.73,1186.72 1723.75,1190.74 v5(1723.75,1278.74)
TC_CS1: U3.111
TC_CS2: U3.112
TCK/SWDCLK: J2.4 U3.28 | length 273.4
  Top Layer w8: U3.28@1697.99,2546.46 1697.99,2592.99 1735,2630 1780,2630 1815,2665 J2.4@1815,2745.08
TDI: J2.8 U3.29 | length 213.8
  Top Layer w8: U3.29@1678.31,2546.46 1678.31,2594.52 1715,2631.21 J2.8@1715,2745.08
TDO/SWO: J2.6 U3.30 | length 330.4
  Top Layer w8: U3.30@1658.62,2546.46 1658.62,2608.62 v2(1680,2630) ; v2(1740,2670) 1765,2695 J2.6@1765,2745.08
  Bottom Layer w8: v2(1680,2630) 1660,2650 1660,2678.23 1675.27,2693.5 1696.5,2693.5 1720,2670 v2(1740,2670)
THERM_AN1: C30_TR1.1 D3_TR1.A D5_TR1.C R14_TR1.2 TP52_TR1.1 U3.88 | length 1696.8
  Top Layer w8: v2(1750,1995) 1740,1985 1740,1968.79 1760,1948.79 1760,1853.79 1835.79,1778 U3.88@1835.79,1715.75 ; v2(2500,2130) 2500,2128.79 2533.79,2095 2559.01,2095 2604.01,2050 2710,2050 ; v2(2808.05,2280.05) 2807.57,2280.52 D3_TR1.A@2807.57,2314.57 ; C30_TR1.1@2867.3,2415.05 2848.05,2415.05 2807.57,2374.57 D3_TR1.A@2807.57,2314.57 ; R14_TR1.2@2869.23,2320.04 2863.76,2314.57 D3_TR1.A@2807.57,2314.57
  Bottom Layer w8: v2(1750,1995) 1768.55,1995 1776.16,1987.39 1795.62,1987.39 1814.12,2005.89 1994.26,2005.89 2004.26,1995.89 2231.41,1995.89 2290,2054.48 2290,2093.79 2374.71,2178.5 2470.29,2178.5 2500,2148.79 v2(2500,2130)
THERM_AN2: C30_TR2.1 D3_TR2.A D5_TR2.C R14_TR2.2 TP52_TR2.1 U3.89 | length 1637
  Top Layer w8: v2(1785.89,2010.89) 1775,2000 1775,1860 1855.47,1779.53 U3.89@1855.47,1715.75 ; v2(2535,2135) 2535,2115 2540,2110 2565.22,2110 2610.22,2065 2703.79,2065
  Top Layer w10: D3_TR2.A@2537.57,2310.52 D3_TR2.A@2537.57,2315.05 ; C30_TR2.1@2592.3,2415.05 2568.05,2415.05 2527.57,2374.57 2527.57,2315.05 D3_TR2.A@2537.57,2315.05 ; R14_TR2.2@2594.23,2320.04 2589.23,2315.05 D3_TR2.A@2537.57,2315.05
  Bottom Layer w8: v2(1785.89,2010.89) 1795.89,2020.89 2000.47,2020.89 2010.47,2010.89 2225.2,2010.89 2275,2060.69 2275,2100 2368.5,2193.5 2476.5,2193.5 v2(2535,2135)
THERM_AN3: C30_TR3.1 D3_TR3.A D5_TR3.C R14_TR3.2 TP52_TR3.1 U3.90 | length 1614.5
  Top Layer w8: v2(1800,1960) 1800,1860 1875.16,1784.84 U3.90@1875.16,1715.75 ; v2(2470,2090) 2493.5,2066.5 2519.86,2066.5 2521.36,2065 2546.58,2065 2591.58,2020 2715,2020 ; 3509.06,2279.53 3521.1,2291.57 D3_TR3.A@3521.1,2315 ; R14_TR3.2@3575,2310 3570,2315 D3_TR3.A@3521.1,2315 ; C30_TR3.1@3575.83,2415 3560,2415 3516.1,2371.1 3516.1,2315 D3_TR3.A@3521.1,2315
  Bottom Layer w8: v2(1800,1960) 1803.5,1956.5 1850.61,1956.5 1870,1975.89 1981.83,1975.89 1991.83,1965.89 2243.84,1965.89 2320,2042.05 2320,2081.36 2387.14,2148.5 2451.09,2148.5 2461.5,2138.09 2461.5,2114.05 2470,2105.55 v2(2470,2090)
THERM_AN4: C30_TR4.1 D3_TR4.A D5_TR4.C R14_TR4.2 TP52_TR4.1 U3.91 | length 1596.2
  Top Layer w8: v2(1825,1980) 1825,1856.21 1894.84,1786.37 U3.91@1894.84,1715.75 ; v2(2505,2090) 2517.57,2090 2527.57,2080 2552.79,2080 2597.79,2035 2740,2035 ; D3_TR4.A@3240.43,2315 3240.43,2348.86 3241.03,2349.45 D5_TR4.C@3241.03,2370 ; D3_TR4.A@3241.1,2315 D3_TR4.A@3241.1,2310 ; D5_TR4.C@3241.1,2374.53 3276.57,2410 C30_TR4.1@3295.83,2410 ; v2(3244.06,2284.53) 3244.06,2307.05 D3_TR4.A@3241.1,2310 ; R14_TR4.2@3295,2305 3290,2310 D3_TR4.A@3241.1,2310
  Bottom Layer w8: v2(1825,1980) 1835.89,1990.89 1988.04,1990.89 1998.04,1980.89 2237.62,1980.89 2305,2048.27 2305,2087.57 2380.93,2163.5 2457.31,2163.5 2476.5,2144.31 2476.5,2120.27 2505,2091.77 v2(2505,2090)
TMS/SWDIO: J2.2 U3.31 | length 394.6
  Top Layer w8: U3.31@1638.94,2546.46 1638.94,2622.17 v2@1685.88,2669.12 ; v2(1865,2665) J2.2@1865,2720.08
  Bottom Layer w8: v2(1685,2670) 1708.5,2646.5 1846.5,2646.5 v2(1865,2665)
TXD0: P5.7 U3.4 | length 2534.8
  Top Layer w8: P5.7@500,1440 500,1455 475,1480 475,1580 525,1630 1141.36,1630 1197,1685.64 1197,1737 v2(1215,1755) ; v2(2110,2405) 2110,2411.21 2170.43,2471.65 U3.4@2170.43,2546.46
  Bottom Layer w8: v2(1215,1755) 1268.23,1755 1293.23,1730 1430,1730 1495,1795 1495,2077.98 1545.52,2128.5 1874.71,2128.5 2110.61,2364.39 2110,2365 v2(2110,2405)
TXD1: U3.17
UD_N: R18.1 U6.6 | length 85.4
  Top Layer w8: R18.1@639.53,2575 U6.6@724.88,2575
UD_P: R20.1 U6.7 | length 85.4
  Top Layer w8: R20.1@639.53,2525 U6.7@724.88,2525
UI_N: R16.2 U6.11 | length 85.4
  Top Layer w8: U6.11@1085.12,2575 1135,2575 R16.2@1170.47,2575
UI_P: R15.2 U6.10 | length 85.4
  Top Layer w8: U6.10@1085.12,2525 1150,2525 R15.2@1170.47,2525
UMCU_N: R16.1 R22.2 U3.38 | length 579.4
  Top Layer w8: R16.1@1229.53,2575 1269.64,2575 1309.64,2615 1460,2615 1520,2555 1520,2465.91 1510,2455.91 U3.38@1469.65,2455.91 1390.28,2455.91 1380,2445.63 R22.2@1370,2445.63
UMCU_P: R5.2 R15.1 U3.37 | length 502.3
  Top Layer w8: R15.1@1229.53,2525 1237.03,2532.5 1262.5,2532.5 1327,2597 1452.54,2597 1502,2547.54 1502,2507.94 U3.37@1469.65,2475.59 1390.98,2475.59 R5.2@1380,2486.57
USB_RX: R25.1 U3.15 | length 1942.6
  Top Layer w8: R25.1@301.77,2830 v2(350,2830) ; U3.15@1953.9,2546.46 1953.9,2591.1 1945,2600 1945,2716.77 1955,2726.77 v2(1955,2760)
  Bottom Layer w8: v2@345,2830 386,2871 1841.57,2871 1952.57,2760 v2(1955,2760)
USB_TX: R26.1 U3.16 | length 1934.3
  Top Layer w8: R26.1@301.77,2775 v2(350,2775) ; v2(1930,2735) 1930,2593.79 1934.21,2589.57 U3.16@1934.21,2546.46
  Bottom Layer w8: v2@345,2775 380,2810 380,2830 406,2856 1835.36,2856 1930,2761.36 v2(1930,2735)
VBUS: C57.1 U3.39 U6.16 | length 797.6
  Top Layer w8: U6.16@1085.12,2825 1135,2825 1145,2815 1225,2815 1265,2775 1265,2740 1300,2705 1350,2705 v2(1370,2685) ; U3.39@1469.65,2436.22 v2@1540,2436.22
  Bottom Layer w8: v2(1370,2685) 1370,2530 1405,2495 1473.79,2495 1524.18,2444.6 1531.5,2444.6 v2(1540,2436.1)
VDD1: C59.1 U6.3 U6.4 U6.5 | length 178.6
  Top Layer w20: C59.1@650,2716 666,2716 675,2725 U6.3@724.88,2725 U6.4@724.88,2675 U6.5@724.88,2625
VDDANA: C13.2 C27.1 FB6.2 U3.73 | length 228.3
  Top Layer w10: 1520.75,1715.75 U3.73@1539.79,1715.75
  Top Layer w15: FB6.2@1330,1671.1 1426.1,1671.1 1456.1,1701.1 1506.1,1701.1 1520.75,1715.75
VDDBU: C28.2 C53.1 FB7.2 U3.52 | length 282.5
  Top Layer w10: FB7.2@1200,2201.38 1206.88,2194.5 1379.85,2194.5 1384.85,2199.5 1405.15,2199.5 1410.15,2194.5 1410.5,2194.5 1424.68,2180.32 U3.52@1469.65,2180.32
VDDIN: C54.1 C55.2 FB5.2 U3.57 | length 441.4
  Top Layer w8: C54.1@1167.77,2078.23 C54.1@1170,2076
  Top Layer w10: C54.1@1168.37,2075 1168.37,2051.63 1186.5,2033.5 1328.5,2033.5 1373.5,2078.5 1382.19,2078.5 1385.58,2081.89 U3.57@1469.65,2081.89
  Top Layer w15: FB5.2@1070,2081.38 1076.38,2075 C54.1@1153.37,2075
VDDOUT: C23.1 C36.2 C37.1 C38.1 C39.1 C41.1 C42.1 FB4.1 U3.10 U3.45 U3.56 U3.61 U3.104 U3.124 | length 4244.2
  Top Layer w10: v1(1200,1955) 1230,1955 1254,1979 1394,1979 1418.15,2003.15 U3.61@1469.65,2003.15 1540.78,2003.15 1598.73,2061.1 v1(1675,2061.1) ; v2(1255,2075) C37.1@1270,2090 ; C37.1@1270,2098.54 1270,2101 1272.23,2103.23 C36.2@1315,2103.23 1322.73,2095.5 1375.15,2095.5 1379.44,2099.8 1467.87,2099.8 U3.56@1469.65,2101.57 ; v1(1305,2485) 1339,2451 1339,2356 1376,2319 1468.76,2319 U3.45@1469.65,2318.11 ; v1(1595,2830) 1595,2788.62 FB4.1@1598.62,2785 ; v2(2011.58,2705) 2055,2661.58 2052.32,2658.9 U3.10@2052.32,2546.46 2052.32,2292.68 v1(2075,2270) ; v1(2150,2170) 2195.79,2124.21 v1(2195.79,2081.89) ; C23.1@2150.75,1618.7 U3.104@2150.75,1715.75 2150.75,1750.91 2130,1771.66 2130,2016.1 v1(2195.79,2081.89) ; C39.1@2435,2086 2423,2086 2423,2082.85 2408.65,2068.5 2383.46,2068.5 2370.07,2081.89 U3.124@2300.35,2081.89 v1(2195.79,2081.89)
  Bottom Layer w10: v1(1200,1955) 1200,2020 v2(1255,2075) ; v1(1305,2485) 1305,2650 1310,2655 1305,2660 1475,2830 v1(1595,2830) 1720,2705 v2(2011.58,2705) ; v1(1675,2061.1) 1695.79,2081.89 v1(2195.79,2081.89) ; v1(2075,2270) 2075,2202.68 2107.68,2170 v1(2150,2170)
VDDPLL: C32.2 C33.1 FB4.2 U3.34 | length 258.5
  Top Layer w10: FB4.2@1546.38,2791.1 1551.38,2786.1 1551.38,2632.14 1579.88,2603.63 U3.34@1579.88,2546.46
VDDUTMI: C60.2 C61.1 FB8.2 U3.41 | length 328.6
  Top Layer w10: v2(1400,2386.1) 1421.1,2386.1 1431.85,2396.85 U3.41@1469.65,2396.85
  Top Layer w15: FB8.2@1185,2301.38 1190.38,2296 1220,2296 1252.77,2296 C60.2@1265,2308.23 1288.23,2308.23 v1(1305,2325)
  Bottom Layer w15: v1(1305,2325) 1331.1,2351.1 1365,2351.1 v2(1400,2386.1)
WP#: U3.101 U9.3 | length 334.1
  Top Layer w8: 2091.69,1381.69 U3.101@2091.69,1715.75
XIN32: U3.48
XOUT32: U3.49
pads on no net: FD1.1 FD2.1 FD3.1 H1.0 H2.0 H3.0 H4.0 J2.7 U3.32 U3.127 U3.128 U3.129 U5.18 U5.19 U5.23 U5.27 U7_M1.18 U7_M1.19 U7_M1.23 U7_M1.27 U7_M2.18 U7_M2.19 U7_M2.23 U7_M2.27 U7_M3.18 U7_M3.19 U7_M3.23 U7_M3.27 U7_M4.18 U7_M4.19 U7_M4.23 U7_M4.27

## Polygon pours and split planes (outlines as drawn)
GND on Top Layer "Top Layer-No Net" (solid, remove dead copper, pour order 76): 3745,3315 3745,3110 4100,3110 4100,3315
NetF2_1 on Top Layer "Top Layer-No Net" (solid, remove dead copper, pour order 72): 3745,3325 4100,3325 4100,4050 3290,4050 3290,3720 3745,3720
GND on Top Layer "Top Layer-No Net" (solid, remove dead copper, pour order 70): 3680,350 3955,350 3955,425 4005,425 4005,465 4020,465 4020,545 3680,545
+12VCC1 on Top Layer "Top Layer-No Net" (solid, remove dead copper, pour order 68): 3600,1150 4100,1150 4100,550 4100,335 3965,335 3965,410 4005,410 4005,460 4025,460 4025,495 4025,550 3725,550 3670,550 3670,350 3390,350 3390,550 3385,555 3385,700 3600,700
NetF3_1 on Top Layer "Top Layer-No Net" (solid, remove dead copper, pour order 66): 4100,2540 4100,2725 3605,2725 3410,2725 3410,2630 3685,2630 3685,2540
GND on Top Layer "Top Layer-No Net" (solid, remove dead copper, pour order 64): 4100,2290 4100,2530 3685,2530 3685,2290
NetF3_1 on Top Layer "Top Layer-No Net" (solid, remove dead copper, pour order 62): 3650,1175 4100,1175 4100,1575 3870,1575 3650,1575
NetF3_1 on Top Layer "Top Layer-No Net" (solid, remove dead copper, pour order 60): 3650,2280 4100,2280 4100,1730 3650,1730
GND on Top Layer "Top Layer-No Net" (solid, remove dead copper, pour order 91): 2310,3140 2280,3140 2280,3170 2280,3255 2130,3255 2130,3175 2125,3170 2050,3170 2050,3080 2215,3080 2310,3080
GND on Top Layer "Top Layer-No Net" (solid, remove dead copper, pour order 92): 1884.5,3109.19 1884.5,3169.19 1824.5,3169.19 1824.5,3254.19 1674.5,3254.19 1674.5,3174.19 1669.5,3169.19 1594.5,3169.19 1594.5,3079.19 1759.5,3079.19 1884.5,3079.19
GND on Top Layer "Top Layer-No Net" (solid, remove dead copper, pour order 93): 1483.5,3109.61 1483.5,3169.61 1423.5,3169.61 1423.5,3254.61 1273.5,3254.61 1273.5,3174.61 1268.5,3169.61 1193.5,3169.61 1193.5,3079.61 1358.5,3079.61 1483.5,3079.61
GND on Top Layer "Top Layer-No Net" (solid, remove dead copper, pour order 94): 1085,3110 1085,3170 1025,3170 1025,3255 875,3255 875,3175 870,3170 795,3170 795,3080 960,3080 1085,3080
GND on Top Layer "Top Layer-No Net" (solid, remove dead copper, pour order 90): 770,3595 725,3595 725,3525 690,3525 690,3470 740,3470 740,3425 725,3425 725,3255 790,3255 790,3340 790,3455 775,3455 775,3595
GND on Top Layer "Top Layer-No Net" (solid, remove dead copper, pour order 89): 525,3595 525,3525 490,3525 490,3485 490,3470 540,3470 540,3420 525,3420 525,3350 615,3260 620,3255 705,3255 705,3420 605,3420 565,3420 565,3595
+12VCC2 on Top Layer "Top Layer-No Net" (solid, remove dead copper, pour order 80): 1650,3390 1595,3390 1595,3460 1580,3460 1580,3495 1580,3600 1580,4030 1585,4030 1745,4030 1745,3980 1745,3695 1700,3695 1700,3595 1700,3480 1650,3480
+12VCC2 on Top Layer "Top Layer-No Net" (solid, remove dead copper, pour order 81): 1250,3390 1195,3390 1195,3460 1180,3460 1180,3495 1180,3600 1180,4030 1185,4030 1345,4030 1345,3980 1345,3695 1300,3695 1300,3595 1300,3480 1250,3480
+12VCC2 on Top Layer "Top Layer-No Net" (solid, remove dead copper, pour order 82): 850,3390 795,3390 795,3460 780,3460 780,3495 780,3600 780,4030 785,4030 945,4030 945,3980 945,3695 900,3695 900,3595 900,3480 850,3480
HTBD on Top Layer "Bottom Layer-No Net" (solid, remove dead copper, pour order 79): 2380.5,3265.81 2620.5,3265.81 2620.5,3665.81 2505,3665.81 2505,4035.81 2150.5,4035.81 2150.5,3755.81 2150.5,3480.81 2125.5,3480.81 2125.5,3325.81 2110.5,3325.81 2110.5,3260.81 2055.5,3260.81 2055.5,3180.81 2132.63,3180.81 2125.5,3180.81 2125.5,3260.81 2130.5,3265.81 2375.5,3265.81
GND on Top Layer "SMPS" (solid, pour order 78): 3377,2933 3405,2961 3493,2961 3543,3011 3543,3134 3418,3134 3369,3085 3367,3083 3367,2950 3367,2933
NetC40_2 on Top Layer "SMPS" (solid, pour order 71): 3363,2867 3340.23,2889.77 3296,2889.77 3189.77,2996 3174,2996 3158,3012 3158,3088 3120,3126 3034,3126 3016,3108 3016,3026 3016,2913 3062,2867 3073,2856 3345,2856 3360,2856 3363,2859
NetD2_A on Top Layer "SMPS" (solid, pour order 69): 3360,2900 3360,3036 3360,3085 3311,3134 3198,3134 3174,3110 3174,3021 3186,3009 3203,3009 3284,2928 3311,2901 3357,2901
HTR0 on Top Layer "Bottom Layer-No Net" (solid, remove dead copper, pour order 59): 875,3260 1070,3260 1070,3270 1185,3270 1185,3465 1185,3605 1185,4030 950,4030 950,3690 915,3690 910,3690 905,3690 905,3470 855,3470 855,3285 795,3285 795,3180 870,3180 870,3260
HTR1 on Top Layer "Bottom Layer-No Net" (solid, remove dead copper, pour order 58): 1275,3260 1470,3260 1470,3270 1585,3270 1585,3465 1585,3605 1585,4030 1350,4030 1350,3690 1315,3690 1310,3690 1305,3690 1305,3470 1255,3470 1255,3285 1195,3285 1195,3180 1270,3180 1270,3260
HTRA on Top Layer "Bottom Layer-No Net" (solid, remove dead copper, pour order 56): 1670,3265 1865,3265 1865,3275 1980,3275 1980,3470 1980,3610 1980,4035 1745,4035 1745,3695 1710,3695 1705,3695 1700,3695 1700,3475 1650,3475 1650,3290 1590,3290 1590,3185 1665,3185 1665,3265
+12VCC3 on Top Layer "Bottom Layer-No Net" (solid, remove dead copper, pour order 67): 1985,4030 1985,3885 1985,3475 1990,3470 2055,3470 2055,3400 2115,3400 2115,3470 2120,3470 2120,3490 2145,3490 2145,4035
NetF1_1 on Bottom Layer "Top Layer-No Net" (solid, remove dead copper, pour order 74): 4100,2925 4100,3315 3745,3315 3745,3720 3290,3720 3290,3580 3290,3140 3590,3140 3590,3010 3745,3010 3745,2985 3745,2925
+12VCC1 on Bottom Layer "Top Layer-No Net" (solid, remove dead copper, pour order 58): 3425,1150 4100,1150 4100,0 0,0 0,700 3430,700
NetF3_1 on Bottom Layer "Top Layer-No Net" (solid, remove dead copper, pour order 56): 4100,2725 3650,2725 3410,2725 3410,1950 3650,1950 3650,1175 4100,1175
HTRA on Bottom Layer "Top Layer-No Net" (solid, remove dead copper, pour order 86): 1670,3260 1985,3260 1985,4030 1750,4030 1750,3690 1705,3690 1705,3470 1655,3470 1655,3260
HTR1 on Bottom Layer "Top Layer-No Net" (solid, remove dead copper, pour order 87): 1270,3260 1585,3260 1585,4030 1350,4030 1350,3690 1305,3690 1305,3470 1255,3470 1255,3260
HTR0 on Bottom Layer "Top Layer-No Net" (solid, remove dead copper, pour order 88): 870,3260 1185,3260 1185,4030 950,4030 950,3690 905,3690 905,3470 855,3470 855,3260
+12VCC2 on Bottom Layer "Top Layer-No Net" (solid, remove dead copper, pour order 84): 1590,4030 1590,3915 1590,3485 1700,3485 1700,3695 1745,3695 1745,4030
+12VCC2 on Bottom Layer "Top Layer-No Net" (solid, remove dead copper, pour order 85): 1190,4030 1190,3915 1190,3485 1300,3485 1300,3695 1345,3695 1345,4030
+12VCC2 on Bottom Layer "Top Layer-No Net" (solid, remove dead copper, pour order 83): 780,4030 945,4030 945,3975 945,3695 900,3695 900,3670 900,3475 850,3475 850,3450 850,3390 795,3390 795,3460 780,3460 780,4030
HTBD on Bottom Layer "Bottom Layer-No Net" (solid, remove dead copper, pour order 60): 2620.5,3075.5 2620.5,3554.5 2580,3595 2040,3595 2000,3555 2000,3200 2000,3080 2045,3035 2165,3035 2580,3035
INPUT_GND on Bottom Layer "Bottom Layer-No Net" (solid, remove dead copper, pour order 108): 875,2445 905,2475 905,2820 875,2850 840,2850 440,2850 405,2815 405,2740 370,2705 345,2705 0,2705 0,2040 195,2040 220,2065 455,2065 515,2125 515,2415 545,2445
INPUT_GND on Groun Plane (split plane): 899.9,2817.89 899.9,2477.11 872.89,2450.1 545,2450.1 543.05,2449.71 541.4,2448.6 511.4,2418.6 510.29,2416.95 509.9,2415 509.9,2127.11 452.89,2070.1 220,2070.1 218.05,2069.71 216.4,2068.6 192.89,2045.1 20.1,2045.1 20.1,2699.9 370,2699.9 371.95,2700.29 373.6,2701.4 408.6,2736.4 409.71,2738.05 410.1,2740 410.1,2812.89 442.11,2844.9 872.89,2844.9
GND on Groun Plane (split plane): 4079.9,20.1 20.1,20.1 20.1,2034.9 74.9,2034.9 74.9,350 75.29,348.05 76.4,346.4 78.05,345.29 80,344.9 344.9,344.9 344.9,171.3 344.9,80 345.29,78.05 346.4,76.4 348.05,75.29 350,74.9 3750,74.9 3751.95,75.29 3753.6,76.4 3754.71,78.05 3755.1,80 3755.1,349.9 4025,349.9 4026.95,350.29 4028.6,351.4 4029.71,353.05 4030.1,355 4030.1,1655 4030.1,2405 4029.71,2406.95 4028.6,2408.6 3950.1,2487.11 3950.1,2707.89 4023.6,2781.4 4024.71,2783.05 4025.1,2785 4025.1,3355 4024.71,3356.95 4023.6,3358.6 4021.95,3359.71 4020,3360.1 4018.05,3359.71 4016.4,3358.6 4015.29,3356.95 4014.9,3355 4014.9,2787.11 3941.4,2713.6 3940.29,2711.95 3939.9,2710 3939.9,2485 3940.29,2483.05 3941.4,2481.4 4019.9,2402.89 4019.9,1655 4019.9,360.1 3750,360.1 3748.05,359.71 3746.4,358.6 3745.29,356.95 3744.9,355 3744.9,85.1 355.1,85.1 355.1,171.3 355.1,350 354.71,351.95 353.6,353.6 351.95,354.71 350,355.1 85.1,355.1 85.1,2034.9 195,2034.9 196.95,2035.29 198.6,2036.4 222.11,2059.9 455,2059.9 456.95,2060.29 458.6,2061.4 518.6,2121.4 519.71,2123.05 520.1,2125 520.1,2412.89 547.11,2439.9 875,2439.9 876.95,2440.29 878.6,2441.4 908.6,2471.4 909.71,2473.05 910.1,2475 910.1,2820 909.71,2821.95 908.6,2823.6 878.6,2853.6 876.95,2854.71 875,2855.1 440,2855.1 438.05,2854.71 436.4,2853.6 401.4,2818.6 400.29,2816.95 399.9,2815 399.9,2742.11 367.89,2710.1 20.1,2710.1 20.1,3227.89 88.6,3296.4 89.71,3298.05 90.1,3300 90.1,3694.9 350,3694.9 351.95,3695.29 353.6,3696.4 354.71,3698.05 355.1,3700 355.1,3964.9 3744.9,3964.9 3744.9,3700 3745.29,3698.05 3746.4,3696.4 3748.05,3695.29 3750,3694.9 3751.95,3695.29 3753.6,3696.4 3754.71,3698.05 3755.1,3700 3755.1,3970 3754.71,3971.95 3753.6,3973.6 3751.95,3974.71 3750,3975.1 350,3975.1 348.05,3974.71 346.4,3973.6 345.29,3971.95 344.9,3970 344.9,3705.1 85,3705.1 83.05,3704.71 81.4,3703.6 80.29,3701.95 79.9,3700 79.9,3302.11 20.1,3242.31 20.1,4029.9 4079.9,4029.9
NetF2_1 on Power Plane (split plane): 4079.9,3635.1 3295.1,3635.1 3295.1,4029.9 4079.9,4029.9
+12VCC3 on Power Plane (split plane): 3284.9,3635.1 2310,3635.1 2308.05,3634.71 2306.4,3633.6 2257.89,3585.1 1975.1,3585.1 1975.1,4017.89 1987.11,4029.9 3284.9,4029.9
+12VCC2 on Power Plane (split plane): 1966.4,4023.6 1965.29,4021.95 1964.9,4020 1964.9,3580 1965.29,3578.05 1966.4,3576.4 1968.05,3575.29 1970,3574.9 2260,3574.9 2261.95,3575.29 2263.6,3576.4 2312.11,3624.9 4079.9,3624.9 4079.9,2630.1 3600.1,2630.1 3600.1,2765 3599.71,2766.95 3598.6,2768.6 3596.95,2769.71 3595,2770.1 2837.11,2770.1 2798.6,2808.6 2796.95,2809.71 2795,2810.1 2495.1,2810.1 2495.1,3025 2494.71,3026.95 2493.6,3028.6 2491.95,3029.71 2490,3030.1 797.11,3030.1 770.1,3057.11 770.1,3245 769.71,3246.95 768.6,3248.6 766.95,3249.71 765,3250.1 305.1,3250.1 305.1,3440 305.1,3445 304.71,3446.95 303.6,3448.6 301.95,3449.71 300,3450.1 20.1,3450.1 20.1,4029.9 1972.69,4029.9
+12VCC1 on Power Plane (split plane): 294.9,3245 295.29,3243.05 296.4,3241.4 298.05,3240.29 300,3239.9 759.9,3239.9 759.9,3055 760.29,3053.05 761.4,3051.4 791.4,3021.4 793.05,3020.29 795,3019.9 2484.9,3019.9 2484.9,2805 2485.29,2803.05 2486.4,2801.4 2488.05,2800.29 2490,2799.9 2792.89,2799.9 2831.4,2761.4 2833.05,2760.29 2835,2759.9 3589.9,2759.9 3589.9,2625 3590.29,2623.05 3591.4,2621.4 3593.05,2620.29 3595,2619.9 4079.9,2619.9 4079.9,1380.1 3502.49,1380.1 3500.54,1379.71 3498.89,1378.6 3497.78,1376.95 3497.39,1375 3497.78,1373.05 3498.89,1371.4 3500.54,1370.29 3502.49,1369.9 4079.9,1369.9 4079.9,20.1 20.1,20.1 20.1,939.9 3502.49,939.9 3504.44,940.29 3506.09,941.4 3507.2,943.05 3507.59,945 3507.2,946.95 3506.09,948.6 3504.44,949.71 3502.49,950.1 3492.59,950.1 3492.59,1375 3492.2,1376.95 3491.09,1378.6 3489.44,1379.71 3487.49,1380.1 3485.54,1379.71 3483.89,1378.6 3482.78,1376.95 3482.39,1375 3482.39,950.1 20.1,950.1 20.1,3439.9 294.9,3439.9

## Keep-outs
Keep-Out Layer:
  lines w10: 15,15 4085,15 4085,4035 15,4035 15,15

## Other copper
Groun Plane (plane layer: these items are gaps in the copper):
  lines w10: 0,2050 10,2040 195,2040 220,2065 303.75,2065 455,2065 515,2125 515,2415 545,2445 715,2445 875,2445 905,2475 905,2820 875,2850 545,2850 440,2850 405,2815 405,2740 370,2705 0,2705 ; 0,2880 0,3215 85,3300 85,3700 350,3700 350,3970 3750,3970 3750,3700 ; 125,2040 80,2040 80,350 350,350 350,171.3 350,80 3750,80 3750,355 3821.57,355 3914.72,355 3971.3,355 4025,355 4025,1655 4025,2405 3945,2485 3945,2710 4020,2785 4020,3355
Power Plane (plane layer: these items are gaps in the copper):
  lines w10: 0,0 1.05,940 ; 1.05,945 3502.49,945 ; 10,3680 10,3445 300,3445 300,3440 300,3245 495,3245 730,3245 765,3245 765,3055 795,3025 2490,3025 2490,2805 2795,2805 2835,2765 3595,2765 3595,2625 4090,2625 4090,2765 4100,2775 4100,2870 ; 1990,4040 1970,4020 1970,3580 2260,3580 2310,3630 4100,3630 ; 3165,3630 3290,3630 3290,4050 ; 3487.49,945 3487.49,1375 ; 3502.49,1375 4095,1375 4095,1290

## Silkscreen, mask and mechanical layers (free items; w line width, h text height)
Top Overlay:
  circle w5: c835,2140 r42
  region: -645,2170 -645,2945 -810,2945 -810,2170
  lines w10: 3740,3740 3780,3740 ; 3760,3720 3760,3760
  text "MOSFETs 5A" at 3425,4090 h75
  text "HEATBED 15A" at 2915,4060 h75
  text "HEAT-0" at 905,3620 h100
  text "HEAT-1" at 1305,3620 h100
  text "AUX" at 1770,3610 h100
  text "HEATBED" at 2155,3610 h100
  text "FAN-0" at 115,3350 h100
  text "FAN-1" at 365,3325 h100
  text "GPIO" at 580,3130 h90
  text "PWR EXP" at 4160,2935 h75
  text "TR-2" at 3254.06,2664.53 h60
  text "TR-4" at 3514.06,2659.53 h60
  text "TR-1" at 2858.05,2650.05 h60
  text "TR-0" at 2568.05,2635.05 h60
  text "U" at 814,2108 h60
  text "Z" at 4235,2090 h90
  text "Y" at 4160,1980 h90
  text "X" at 4275,1875 h90
  text "MAX" at 4733,1755 h120 r90
  text "MIN" at 5666,1730 h120 r90
  text "ERASE" at 2405,1465 h75
  text "MTR PWR" at 4930,1135 h90 r90
  text "E1" at 2605,270 h150
  text "E0" at 3200,270 h150
  text "X" at 380,265 h150
  text "Y" at 960,265 h150
  text "Z" at 1550,265 h150